# EAGLE board Qwiic_Alphanumeric_Display-Panel (EAGLE 9.4.2), part 1 of 4
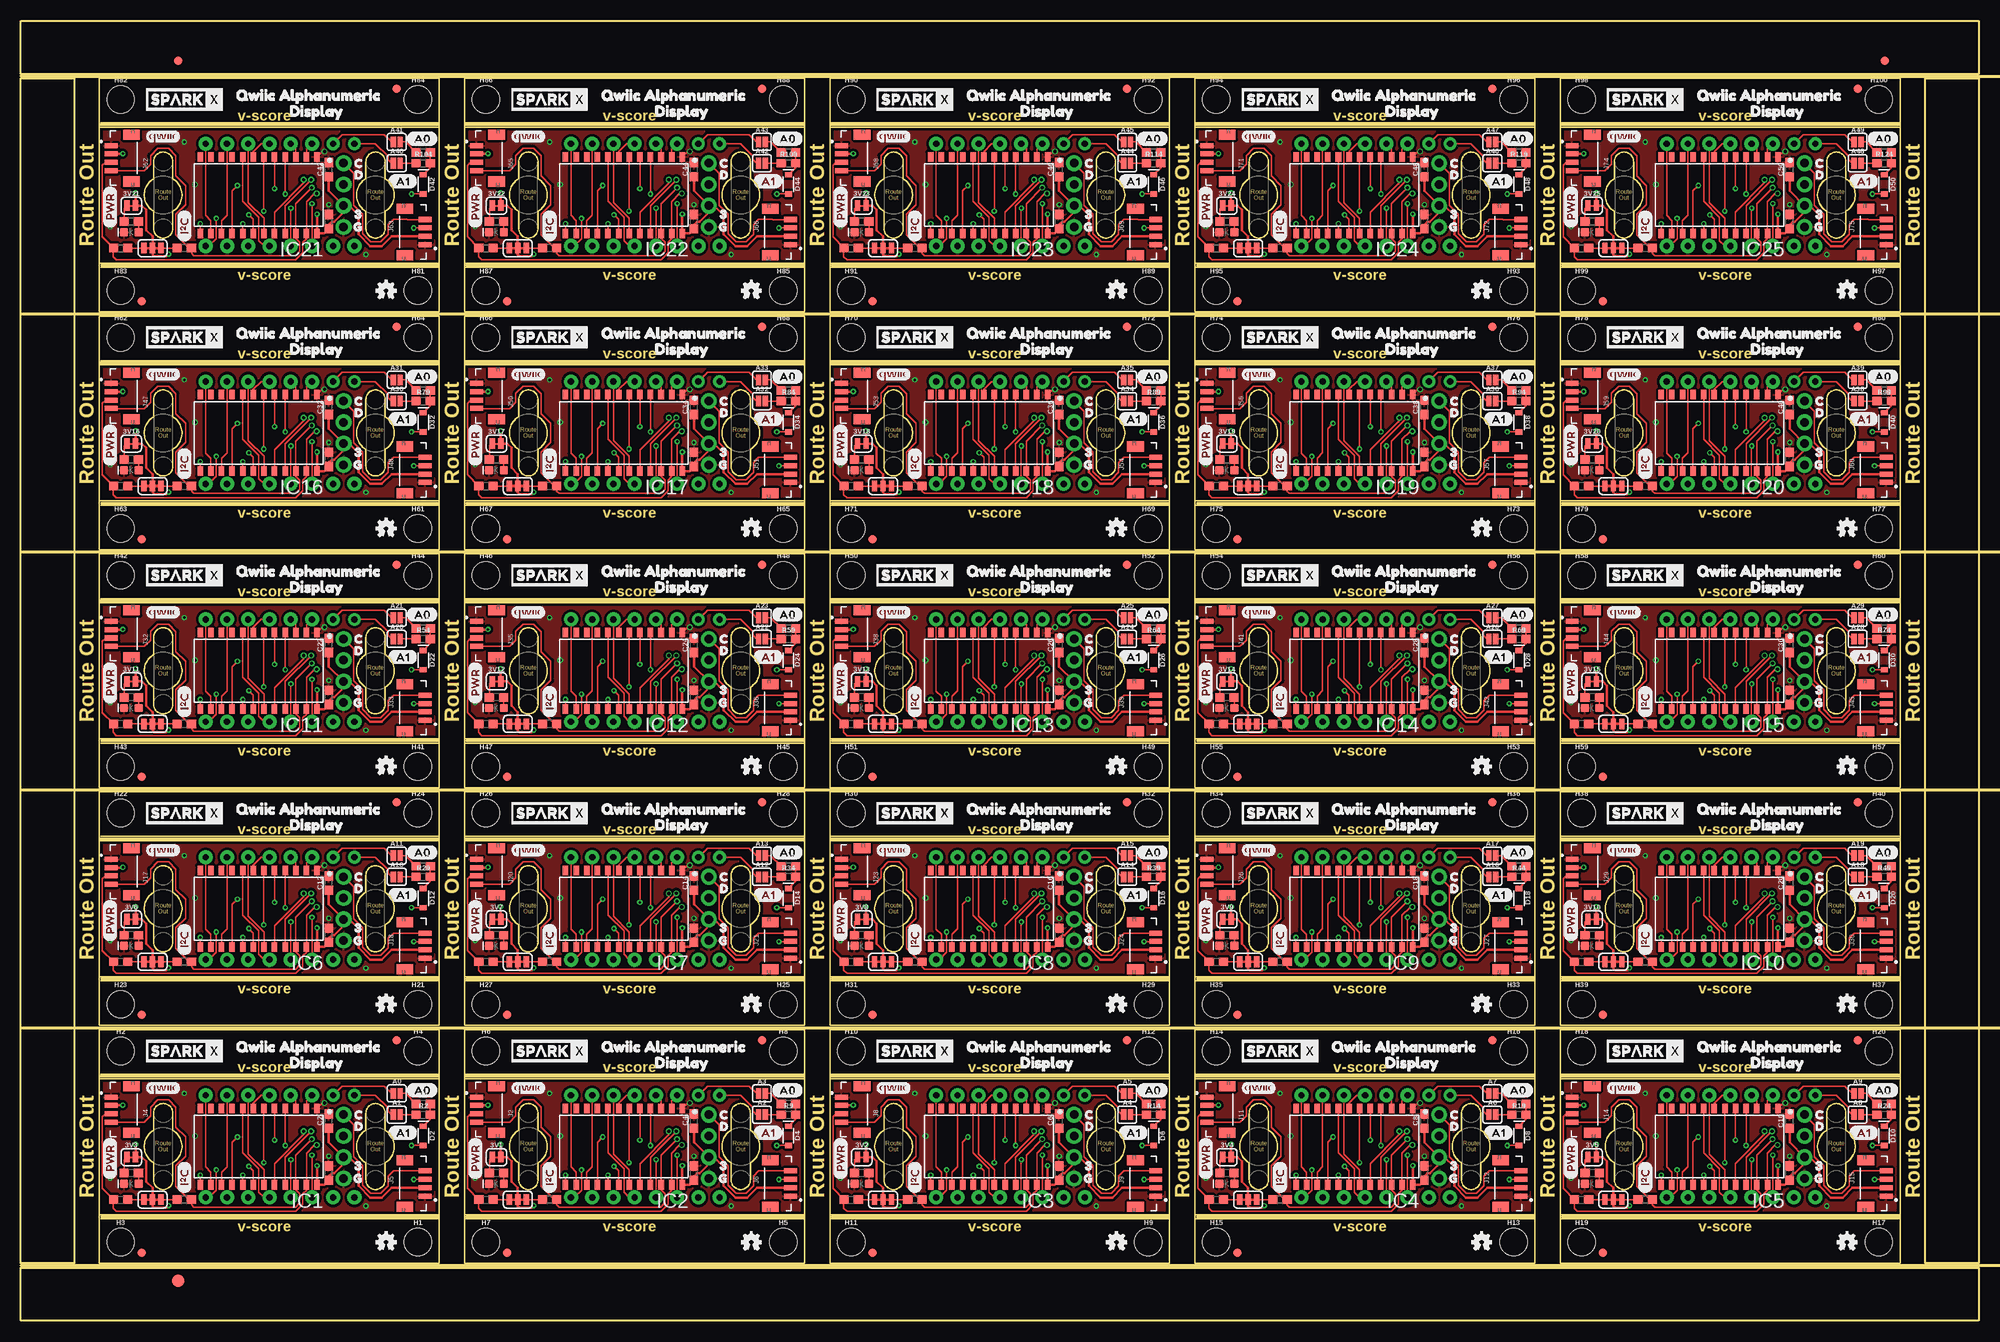
[diagram p0: board, top side]
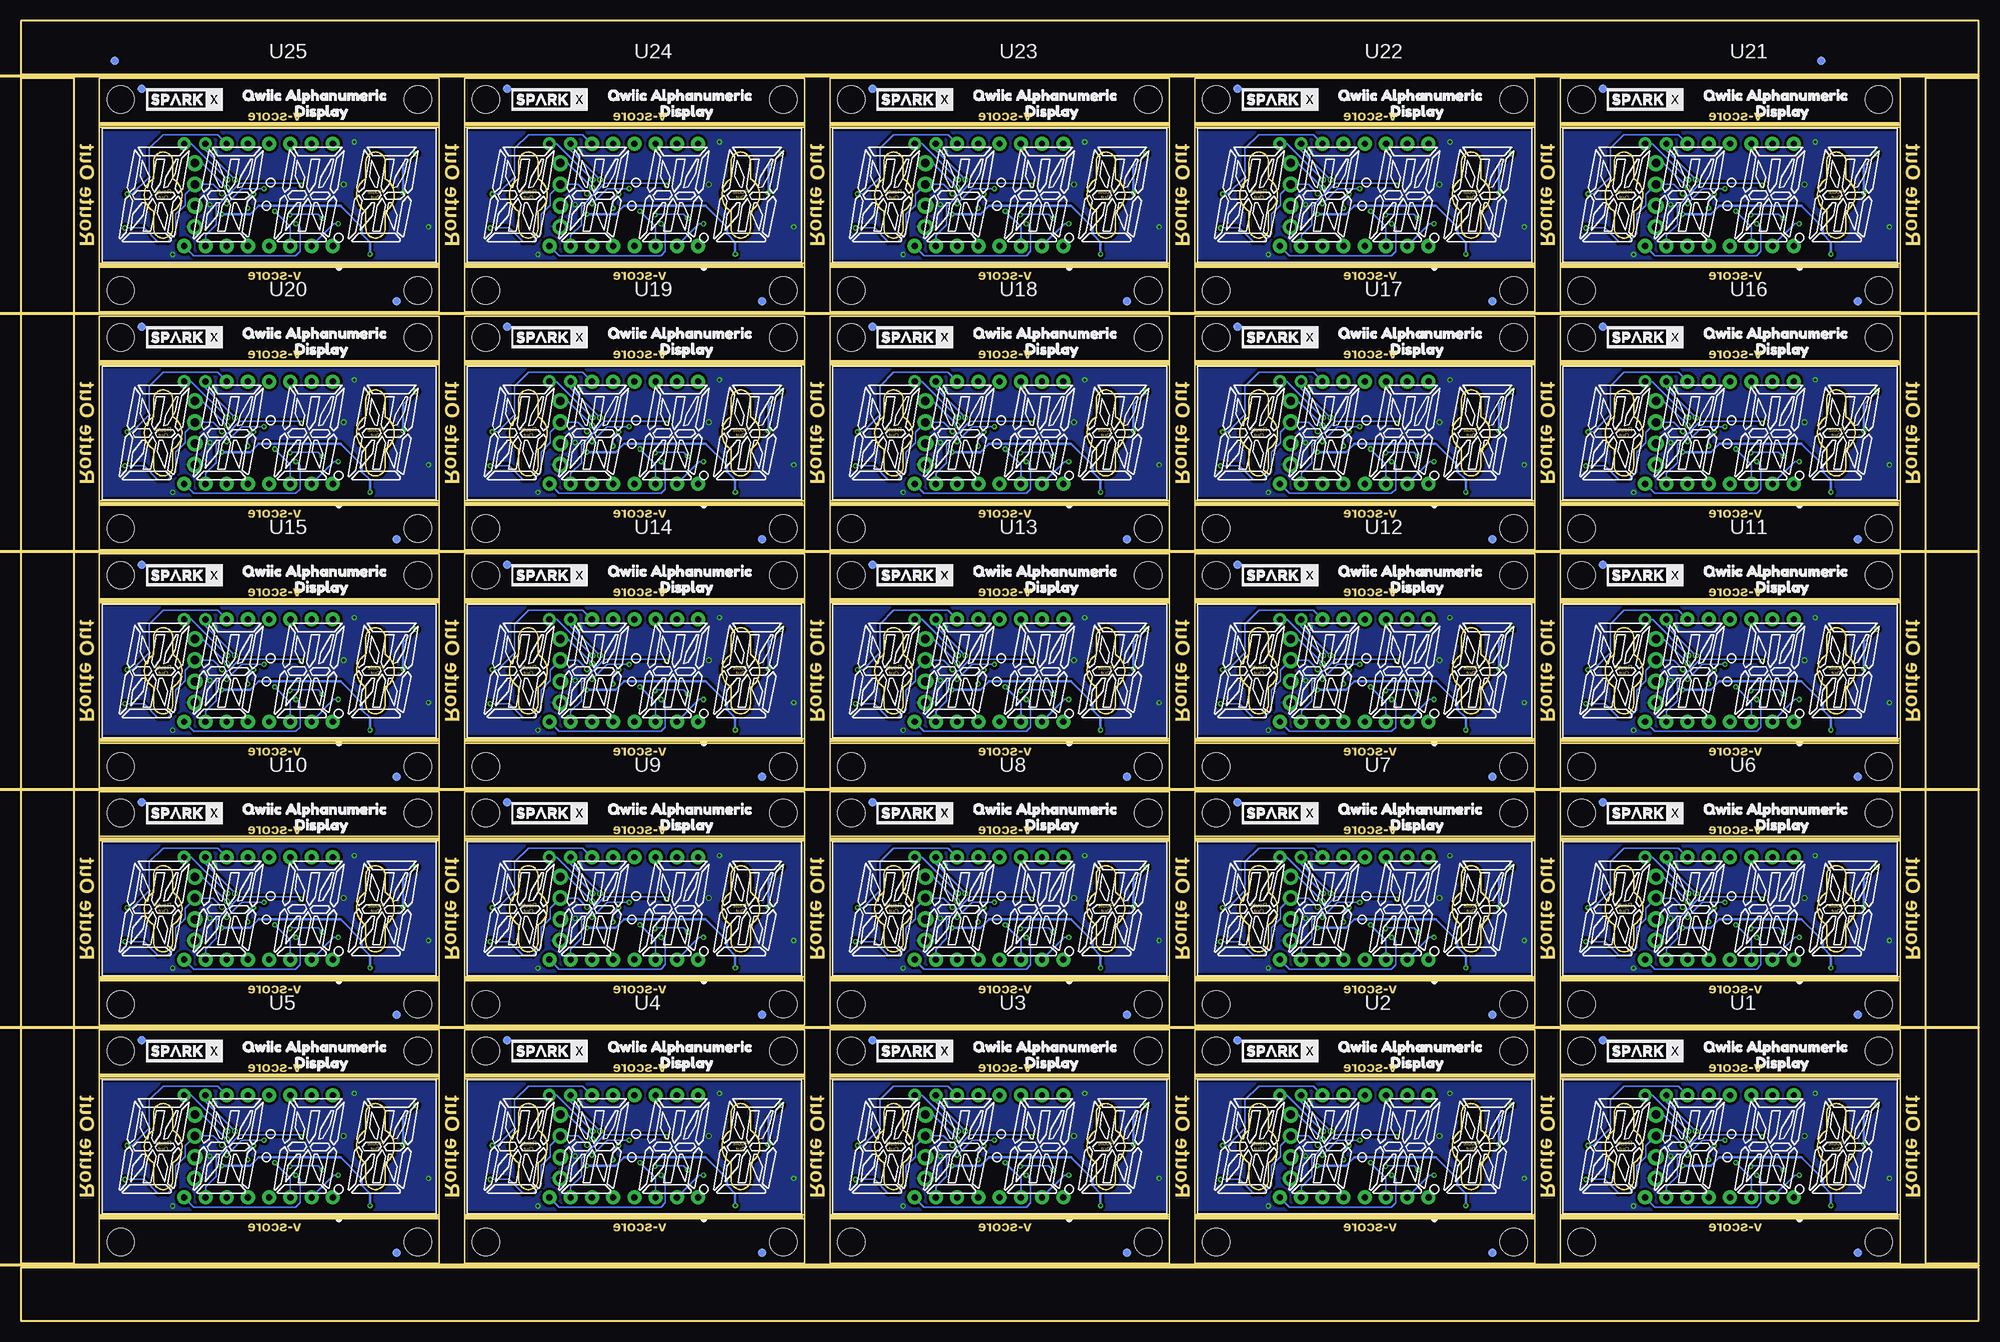
[diagram p1: board, bottom side, seen from below]

Size 234.19 x 155.45 mm. Coordinates in mm from the lower left corner, seen from the top.
Outline: 316 segments
Copper layers (1*16): Top 0.035mm / dielectric 1.5mm / Bottom 0.035mm
Design rules "Qwiic_Alphanumeric_Display": minimum track width 6mil, minimum drill 0.3mm, track to track 6mil, track to pad 6mil, pad to pad 6mil, via to via 6mil, smd to smd 6mil, copper to edge 6mil, drill to drill 6mil, minimum pad ring 6mil, minimum via ring 6mil, stop-mask expansion 4mil, vias tented up to drill 25mil, thermal gap 10mil
Milling: 56 lines

## Footprints (pad centres in the part's own frame; a part is rotated, then mirrored left to right if it is on the bottom)
SMT-JUMPER_2_NC_TRACE_SILK = smd 0.635 x 1.27: 1 -0.508,0; 2 0.508,0
SMT-JUMPER_2_NO_SILK = smd 0.635 x 1.27: 1 -0.406,0; 2 0.406,0
0603 = smd 1.1 x 1: 1 -0.85,0; 2 0.85,0
LED-0603 = smd 1 x 1: A -0.877,0; C 0.877,0
SOD-323 = smd 0.63 x 0.83: A 1.15,0; C -1.15,0
FIDUCIAL-1X2 = smd 1 x 1: 1 0,0
FIDUCIAL-1.5X3 = smd 1.5 x 1.5: 1 0,0
STAND-OFF = hole 3.302: 0,0
SMT-JUMPER_3_2-NC_TRACE_SILK = smd 0.635 x 1.27: 1 -1.016,0; 2 0,0; 3 1.016,0
HT16K33 = smd 0.66 x 1.143: 1 -6.985,-4.572; 2 -5.715,-4.572; 3 -4.445,-4.572; 4 -3.175,-4.572; 5 -1.905,-4.572; 6 -0.635,-4.572; 7 0.635,-4.572; 8 1.905,-4.572; 9 3.175,-4.572; 10 4.445,-4.572; 11 5.715,-4.572; 12 6.985,-4.572; 13 6.985,4.572; 14 5.715,4.572; 15 4.445,4.572; 16 3.175,4.572; 17 1.905,4.572; 18 0.635,4.572; 19 -0.635,4.572; 20 -1.905,4.572; 21 -3.175,4.572; 22 -4.445,4.572; 23 -5.715,4.572; 24 -6.985,4.572
1X04_NO_SILK = drill 1.016 pad 1.88: 1 0,0; 2 2.54,0; 3 5.08,0; 4 7.62,0
JST04_1MM_VERT = smd 0.6 x 1.55: 1 -1.478,0.775; 2 -0.478,0.775; 3 0.522,0.775; 4 1.522,0.775 | smd 1.2 x 2: NC1 -2.778,3.2; NC2 2.822,3.2
SILSMART_DISPLAY = drill 0.75 pad 1.676: 1 -10.178,-6.092; 2 -7.638,-6.092; 3 -5.098,-6.092; 4 -2.558,-6.092; 5 -0.018,-6.092; 6 2.522,-6.092; 7 5.062,-6.092; 8 7.602,-6.092; 9 7.602,6.148; 10 5.062,6.148; 11 2.522,6.148; 12 -0.018,6.148; 13 -2.558,6.148; 14 -5.098,6.148 | drill 0.75 pad 1.524: 15 -7.638,6.148; 16 -10.178,6.148

## Placement (x,y rotation side)
3V1  JUMPER-SMT_2_NC_TRACE_SILK  [SMT-JUMPER_2_NC_TRACE_SILK]  56.9,19.56 0 top
3V2  JUMPER-SMT_2_NC_TRACE_SILK  [SMT-JUMPER_2_NC_TRACE_SILK]  100.58,19.56 0 top
3V3  JUMPER-SMT_2_NC_TRACE_SILK  [SMT-JUMPER_2_NC_TRACE_SILK]  13.21,19.56 0 top
3V4  JUMPER-SMT_2_NC_TRACE_SILK  [SMT-JUMPER_2_NC_TRACE_SILK]  144.27,19.56 0 top
3V5  JUMPER-SMT_2_NC_TRACE_SILK  [SMT-JUMPER_2_NC_TRACE_SILK]  187.96,19.56 0 top
3V6  JUMPER-SMT_2_NC_TRACE_SILK  [SMT-JUMPER_2_NC_TRACE_SILK]  13.21,48.01 0 top
3V7  JUMPER-SMT_2_NC_TRACE_SILK  [SMT-JUMPER_2_NC_TRACE_SILK]  56.9,48.01 0 top
3V8  JUMPER-SMT_2_NC_TRACE_SILK  [SMT-JUMPER_2_NC_TRACE_SILK]  100.58,48.01 0 top
3V9  JUMPER-SMT_2_NC_TRACE_SILK  [SMT-JUMPER_2_NC_TRACE_SILK]  144.27,48.01 0 top
3V10  JUMPER-SMT_2_NC_TRACE_SILK  [SMT-JUMPER_2_NC_TRACE_SILK]  187.96,48.01 0 top
3V11  JUMPER-SMT_2_NC_TRACE_SILK  [SMT-JUMPER_2_NC_TRACE_SILK]  13.21,76.45 0 top
3V12  JUMPER-SMT_2_NC_TRACE_SILK  [SMT-JUMPER_2_NC_TRACE_SILK]  56.9,76.45 0 top
3V13  JUMPER-SMT_2_NC_TRACE_SILK  [SMT-JUMPER_2_NC_TRACE_SILK]  100.58,76.45 0 top
3V14  JUMPER-SMT_2_NC_TRACE_SILK  [SMT-JUMPER_2_NC_TRACE_SILK]  144.27,76.45 0 top
3V15  JUMPER-SMT_2_NC_TRACE_SILK  [SMT-JUMPER_2_NC_TRACE_SILK]  187.96,76.45 0 top
3V16  JUMPER-SMT_2_NC_TRACE_SILK  [SMT-JUMPER_2_NC_TRACE_SILK]  13.21,104.9 0 top
3V17  JUMPER-SMT_2_NC_TRACE_SILK  [SMT-JUMPER_2_NC_TRACE_SILK]  56.9,104.9 0 top
3V18  JUMPER-SMT_2_NC_TRACE_SILK  [SMT-JUMPER_2_NC_TRACE_SILK]  100.58,104.9 0 top
3V19  JUMPER-SMT_2_NC_TRACE_SILK  [SMT-JUMPER_2_NC_TRACE_SILK]  144.27,104.9 0 top
3V20  JUMPER-SMT_2_NC_TRACE_SILK  [SMT-JUMPER_2_NC_TRACE_SILK]  187.96,104.9 0 top
3V21  JUMPER-SMT_2_NC_TRACE_SILK  [SMT-JUMPER_2_NC_TRACE_SILK]  13.21,133.35 0 top
3V22  JUMPER-SMT_2_NC_TRACE_SILK  [SMT-JUMPER_2_NC_TRACE_SILK]  56.9,133.35 0 top
3V23  JUMPER-SMT_2_NC_TRACE_SILK  [SMT-JUMPER_2_NC_TRACE_SILK]  100.58,133.35 0 top
3V24  JUMPER-SMT_2_NC_TRACE_SILK  [SMT-JUMPER_2_NC_TRACE_SILK]  144.27,133.35 0 top
3V25  JUMPER-SMT_2_NC_TRACE_SILK  [SMT-JUMPER_2_NC_TRACE_SILK]  187.96,133.35 0 top
A0  JUMPER-SMT_2_NO_SILK  [SMT-JUMPER_2_NO_SILK]  44.96,27.18 0 top
A1  JUMPER-SMT_2_NO_SILK  [SMT-JUMPER_2_NO_SILK]  44.96,24.64 0 top
A2  JUMPER-SMT_2_NO_SILK  [SMT-JUMPER_2_NO_SILK]  88.65,24.64 0 top
A3  JUMPER-SMT_2_NO_SILK  [SMT-JUMPER_2_NO_SILK]  88.65,27.18 0 top
A4  JUMPER-SMT_2_NO_SILK  [SMT-JUMPER_2_NO_SILK]  132.33,24.64 0 top
A5  JUMPER-SMT_2_NO_SILK  [SMT-JUMPER_2_NO_SILK]  132.33,27.18 0 top
A6  JUMPER-SMT_2_NO_SILK  [SMT-JUMPER_2_NO_SILK]  176.02,24.64 0 top
A7  JUMPER-SMT_2_NO_SILK  [SMT-JUMPER_2_NO_SILK]  176.02,27.18 0 top
A8  JUMPER-SMT_2_NO_SILK  [SMT-JUMPER_2_NO_SILK]  219.71,24.64 0 top
A9  JUMPER-SMT_2_NO_SILK  [SMT-JUMPER_2_NO_SILK]  219.71,27.18 0 top
A10  JUMPER-SMT_2_NO_SILK  [SMT-JUMPER_2_NO_SILK]  44.96,53.09 0 top
A11  JUMPER-SMT_2_NO_SILK  [SMT-JUMPER_2_NO_SILK]  44.96,55.63 0 top
A12  JUMPER-SMT_2_NO_SILK  [SMT-JUMPER_2_NO_SILK]  88.65,53.09 0 top
A13  JUMPER-SMT_2_NO_SILK  [SMT-JUMPER_2_NO_SILK]  88.65,55.63 0 top
A14  JUMPER-SMT_2_NO_SILK  [SMT-JUMPER_2_NO_SILK]  132.33,53.09 0 top
A15  JUMPER-SMT_2_NO_SILK  [SMT-JUMPER_2_NO_SILK]  132.33,55.63 0 top
A16  JUMPER-SMT_2_NO_SILK  [SMT-JUMPER_2_NO_SILK]  176.02,53.09 0 top
A17  JUMPER-SMT_2_NO_SILK  [SMT-JUMPER_2_NO_SILK]  176.02,55.63 0 top
A18  JUMPER-SMT_2_NO_SILK  [SMT-JUMPER_2_NO_SILK]  219.71,53.09 0 top
A19  JUMPER-SMT_2_NO_SILK  [SMT-JUMPER_2_NO_SILK]  219.71,55.63 0 top
A20  JUMPER-SMT_2_NO_SILK  [SMT-JUMPER_2_NO_SILK]  44.96,81.53 0 top
A21  JUMPER-SMT_2_NO_SILK  [SMT-JUMPER_2_NO_SILK]  44.96,84.07 0 top
A22  JUMPER-SMT_2_NO_SILK  [SMT-JUMPER_2_NO_SILK]  88.65,81.53 0 top
A23  JUMPER-SMT_2_NO_SILK  [SMT-JUMPER_2_NO_SILK]  88.65,84.07 0 top
A24  JUMPER-SMT_2_NO_SILK  [SMT-JUMPER_2_NO_SILK]  132.33,81.53 0 top
A25  JUMPER-SMT_2_NO_SILK  [SMT-JUMPER_2_NO_SILK]  132.33,84.07 0 top
A26  JUMPER-SMT_2_NO_SILK  [SMT-JUMPER_2_NO_SILK]  176.02,81.53 0 top
A27  JUMPER-SMT_2_NO_SILK  [SMT-JUMPER_2_NO_SILK]  176.02,84.07 0 top
A28  JUMPER-SMT_2_NO_SILK  [SMT-JUMPER_2_NO_SILK]  219.71,81.53 0 top
A29  JUMPER-SMT_2_NO_SILK  [SMT-JUMPER_2_NO_SILK]  219.71,84.07 0 top
A30  JUMPER-SMT_2_NO_SILK  [SMT-JUMPER_2_NO_SILK]  44.96,109.98 0 top
A31  JUMPER-SMT_2_NO_SILK  [SMT-JUMPER_2_NO_SILK]  44.96,112.52 0 top
A32  JUMPER-SMT_2_NO_SILK  [SMT-JUMPER_2_NO_SILK]  88.65,109.98 0 top
A33  JUMPER-SMT_2_NO_SILK  [SMT-JUMPER_2_NO_SILK]  88.65,112.52 0 top
A34  JUMPER-SMT_2_NO_SILK  [SMT-JUMPER_2_NO_SILK]  132.33,109.98 0 top
A35  JUMPER-SMT_2_NO_SILK  [SMT-JUMPER_2_NO_SILK]  132.33,112.52 0 top
A36  JUMPER-SMT_2_NO_SILK  [SMT-JUMPER_2_NO_SILK]  176.02,109.98 0 top
A37  JUMPER-SMT_2_NO_SILK  [SMT-JUMPER_2_NO_SILK]  176.02,112.52 0 top
A38  JUMPER-SMT_2_NO_SILK  [SMT-JUMPER_2_NO_SILK]  219.71,109.98 0 top
A39  JUMPER-SMT_2_NO_SILK  [SMT-JUMPER_2_NO_SILK]  219.71,112.52 0 top
A40  JUMPER-SMT_2_NO_SILK  [SMT-JUMPER_2_NO_SILK]  44.96,138.43 0 top
A41  JUMPER-SMT_2_NO_SILK  [SMT-JUMPER_2_NO_SILK]  44.96,140.97 0 top
A42  JUMPER-SMT_2_NO_SILK  [SMT-JUMPER_2_NO_SILK]  88.65,138.43 0 top
A43  JUMPER-SMT_2_NO_SILK  [SMT-JUMPER_2_NO_SILK]  88.65,140.97 0 top
A44  JUMPER-SMT_2_NO_SILK  [SMT-JUMPER_2_NO_SILK]  132.33,138.43 0 top
A45  JUMPER-SMT_2_NO_SILK  [SMT-JUMPER_2_NO_SILK]  132.33,140.97 0 top
A46  JUMPER-SMT_2_NO_SILK  [SMT-JUMPER_2_NO_SILK]  176.02,138.43 0 top
A47  JUMPER-SMT_2_NO_SILK  [SMT-JUMPER_2_NO_SILK]  176.02,140.97 0 top
A48  JUMPER-SMT_2_NO_SILK  [SMT-JUMPER_2_NO_SILK]  219.71,138.43 0 top
A49  JUMPER-SMT_2_NO_SILK  [SMT-JUMPER_2_NO_SILK]  219.71,140.97 0 top
C1  0.1uF  [0603]  36.83,17.65 90 top
C2  10uF  [0603]  36.83,23.88 90 top
C3  0.1uF  [0603]  80.52,17.65 90 top
C4  10uF  [0603]  80.52,23.88 90 top
C5  0.1uF  [0603]  124.21,17.65 90 top
C6  10uF  [0603]  124.21,23.88 90 top
C7  0.1uF  [0603]  167.89,17.65 90 top
C8  10uF  [0603]  167.89,23.88 90 top
C9  0.1uF  [0603]  211.58,17.65 90 top
C10  10uF  [0603]  211.58,23.88 90 top
C11  0.1uF  [0603]  36.83,46.1 90 top
C12  10uF  [0603]  36.83,52.32 90 top
C13  0.1uF  [0603]  80.52,46.1 90 top
C14  10uF  [0603]  80.52,52.32 90 top
C15  0.1uF  [0603]  124.21,46.1 90 top
C16  10uF  [0603]  124.21,52.32 90 top
C17  0.1uF  [0603]  167.89,46.1 90 top
C18  10uF  [0603]  167.89,52.32 90 top
C19  0.1uF  [0603]  211.58,46.1 90 top
C20  10uF  [0603]  211.58,52.32 90 top
C21  0.1uF  [0603]  36.83,74.55 90 top
C22  10uF  [0603]  36.83,80.77 90 top
C23  0.1uF  [0603]  80.52,74.55 90 top
C24  10uF  [0603]  80.52,80.77 90 top
C25  0.1uF  [0603]  124.21,74.55 90 top
C26  10uF  [0603]  124.21,80.77 90 top
C27  0.1uF  [0603]  167.89,74.55 90 top
C28  10uF  [0603]  167.89,80.77 90 top
C29  0.1uF  [0603]  211.58,74.55 90 top
C30  10uF  [0603]  211.58,80.77 90 top
C31  0.1uF  [0603]  36.83,103 90 top
C32  10uF  [0603]  36.83,109.22 90 top
C33  0.1uF  [0603]  80.52,103 90 top
C34  10uF  [0603]  80.52,109.22 90 top
C35  0.1uF  [0603]  124.21,103 90 top
C36  10uF  [0603]  124.21,109.22 90 top
C37  0.1uF  [0603]  167.89,103 90 top
C38  10uF  [0603]  167.89,109.22 90 top
C39  0.1uF  [0603]  211.58,103 90 top
C40  10uF  [0603]  211.58,109.22 90 top
C41  0.1uF  [0603]  36.83,131.44 90 top
C42  10uF  [0603]  36.83,137.67 90 top
C43  0.1uF  [0603]  80.52,131.44 90 top
C44  10uF  [0603]  80.52,137.67 90 top
C45  0.1uF  [0603]  124.21,131.44 90 top
C46  10uF  [0603]  124.21,137.67 90 top
C47  0.1uF  [0603]  167.89,131.44 90 top
C48  10uF  [0603]  167.89,137.67 90 top
C49  0.1uF  [0603]  211.58,131.44 90 top
C50  10uF  [0603]  211.58,137.67 90 top
D1  RED  [LED-0603]  13.21,16.38 180 top
D2  250mA/100V  [SOD-323]  48.13,22.1 270 top
D3  RED  [LED-0603]  56.9,16.38 180 top
D4  250mA/100V  [SOD-323]  91.82,22.1 270 top
D5  RED  [LED-0603]  100.58,16.38 180 top
D6  250mA/100V  [SOD-323]  135.51,22.1 270 top
D7  RED  [LED-0603]  144.27,16.38 180 top
D8  250mA/100V  [SOD-323]  179.2,22.1 270 top
D9  RED  [LED-0603]  187.96,16.38 180 top
D10  250mA/100V  [SOD-323]  222.88,22.1 270 top
D11  RED  [LED-0603]  13.21,44.83 180 top
D12  250mA/100V  [SOD-323]  48.13,50.55 270 top
D13  RED  [LED-0603]  56.9,44.83 180 top
D14  250mA/100V  [SOD-323]  91.82,50.55 270 top
D15  RED  [LED-0603]  100.58,44.83 180 top
D16  250mA/100V  [SOD-323]  135.51,50.55 270 top
D17  RED  [LED-0603]  144.27,44.83 180 top
D18  250mA/100V  [SOD-323]  179.2,50.55 270 top
D19  RED  [LED-0603]  187.96,44.83 180 top
D20  250mA/100V  [SOD-323]  222.88,50.55 270 top
D21  RED  [LED-0603]  13.21,73.28 180 top
D22  250mA/100V  [SOD-323]  48.13,78.99 270 top
D23  RED  [LED-0603]  56.9,73.28 180 top
D24  250mA/100V  [SOD-323]  91.82,78.99 270 top
D25  RED  [LED-0603]  100.58,73.28 180 top
D26  250mA/100V  [SOD-323]  135.51,78.99 270 top
D27  RED  [LED-0603]  144.27,73.28 180 top
D28  250mA/100V  [SOD-323]  179.2,78.99 270 top
D29  RED  [LED-0603]  187.96,73.28 180 top
D30  250mA/100V  [SOD-323]  222.88,78.99 270 top
D31  RED  [LED-0603]  13.21,101.73 180 top
D32  250mA/100V  [SOD-323]  48.13,107.44 270 top
D33  RED  [LED-0603]  56.9,101.73 180 top
D34  250mA/100V  [SOD-323]  91.82,107.44 270 top
D35  RED  [LED-0603]  100.58,101.73 180 top
D36  250mA/100V  [SOD-323]  135.51,107.44 270 top
D37  RED  [LED-0603]  144.27,101.73 180 top
D38  250mA/100V  [SOD-323]  179.2,107.44 270 top
D39  RED  [LED-0603]  187.96,101.73 180 top
D40  250mA/100V  [SOD-323]  222.88,107.44 270 top
D41  RED  [LED-0603]  13.21,130.17 180 top
D42  250mA/100V  [SOD-323]  48.13,135.89 270 top
D43  RED  [LED-0603]  56.9,130.17 180 top
D44  250mA/100V  [SOD-323]  91.82,135.89 270 top
D45  RED  [LED-0603]  100.58,130.17 180 top
D46  250mA/100V  [SOD-323]  135.51,135.89 270 top
D47  RED  [LED-0603]  144.27,130.17 180 top
D48  250mA/100V  [SOD-323]  179.2,135.89 270 top
D49  RED  [LED-0603]  187.96,130.17 180 top
D50  250mA/100V  [SOD-323]  222.88,135.89 270 top
E$1  [FIDUCIAL-1X2]  18.8,150.69 0 top
E$2  [FIDUCIAL-1X2]  18.8,150.69 0 bottom
E$3  [FIDUCIAL-1X2]  222.95,150.69 0 top
E$4  [FIDUCIAL-1X2]  222.95,150.69 0 bottom
E$5  [FIDUCIAL-1.5X3]  18.8,4.76 0 top
FD1  FIDUCIAL1X2  [FIDUCIAL-1X2]  14.48,8.13 0 top
FD2  FIDUCIAL1X2  [FIDUCIAL-1X2]  14.48,8.13 0 bottom
FD3  FIDUCIAL1X2  [FIDUCIAL-1X2]  44.96,33.53 0 top
FD4  FIDUCIAL1X2  [FIDUCIAL-1X2]  44.96,33.53 0 bottom
FD5  FIDUCIAL1X2  [FIDUCIAL-1X2]  58.17,8.13 0 top
FD6  FIDUCIAL1X2  [FIDUCIAL-1X2]  58.17,8.13 0 bottom
FD7  FIDUCIAL1X2  [FIDUCIAL-1X2]  88.65,33.53 0 top
FD8  FIDUCIAL1X2  [FIDUCIAL-1X2]  88.65,33.53 0 bottom
FD9  FIDUCIAL1X2  [FIDUCIAL-1X2]  101.85,8.13 0 top
FD10  FIDUCIAL1X2  [FIDUCIAL-1X2]  101.85,8.13 0 bottom
FD11  FIDUCIAL1X2  [FIDUCIAL-1X2]  132.33,33.53 0 top
FD12  FIDUCIAL1X2  [FIDUCIAL-1X2]  132.33,33.53 0 bottom
FD13  FIDUCIAL1X2  [FIDUCIAL-1X2]  145.54,8.13 0 top
FD14  FIDUCIAL1X2  [FIDUCIAL-1X2]  145.54,8.13 0 bottom
FD15  FIDUCIAL1X2  [FIDUCIAL-1X2]  176.02,33.53 0 top
FD16  FIDUCIAL1X2  [FIDUCIAL-1X2]  176.02,33.53 0 bottom
FD17  FIDUCIAL1X2  [FIDUCIAL-1X2]  189.23,8.13 0 top
FD18  FIDUCIAL1X2  [FIDUCIAL-1X2]  189.23,8.13 0 bottom
FD19  FIDUCIAL1X2  [FIDUCIAL-1X2]  219.71,33.53 0 top
FD20  FIDUCIAL1X2  [FIDUCIAL-1X2]  219.71,33.53 0 bottom
FD21  FIDUCIAL1X2  [FIDUCIAL-1X2]  14.48,36.58 0 top
FD22  FIDUCIAL1X2  [FIDUCIAL-1X2]  14.48,36.58 0 bottom
FD23  FIDUCIAL1X2  [FIDUCIAL-1X2]  44.96,61.98 0 top
FD24  FIDUCIAL1X2  [FIDUCIAL-1X2]  44.96,61.98 0 bottom
FD25  FIDUCIAL1X2  [FIDUCIAL-1X2]  58.17,36.58 0 top
FD26  FIDUCIAL1X2  [FIDUCIAL-1X2]  58.17,36.58 0 bottom
FD27  FIDUCIAL1X2  [FIDUCIAL-1X2]  88.65,61.98 0 top
FD28  FIDUCIAL1X2  [FIDUCIAL-1X2]  88.65,61.98 0 bottom
FD29  FIDUCIAL1X2  [FIDUCIAL-1X2]  101.85,36.58 0 top
FD30  FIDUCIAL1X2  [FIDUCIAL-1X2]  101.85,36.58 0 bottom
FD31  FIDUCIAL1X2  [FIDUCIAL-1X2]  132.33,61.98 0 top
FD32  FIDUCIAL1X2  [FIDUCIAL-1X2]  132.33,61.98 0 bottom
FD33  FIDUCIAL1X2  [FIDUCIAL-1X2]  145.54,36.58 0 top
FD34  FIDUCIAL1X2  [FIDUCIAL-1X2]  145.54,36.58 0 bottom
FD35  FIDUCIAL1X2  [FIDUCIAL-1X2]  176.02,61.98 0 top
FD36  FIDUCIAL1X2  [FIDUCIAL-1X2]  176.02,61.98 0 bottom
FD37  FIDUCIAL1X2  [FIDUCIAL-1X2]  189.23,36.58 0 top
FD38  FIDUCIAL1X2  [FIDUCIAL-1X2]  189.23,36.58 0 bottom
FD39  FIDUCIAL1X2  [FIDUCIAL-1X2]  219.71,61.98 0 top
FD40  FIDUCIAL1X2  [FIDUCIAL-1X2]  219.71,61.98 0 bottom
FD41  FIDUCIAL1X2  [FIDUCIAL-1X2]  14.48,65.02 0 top
FD42  FIDUCIAL1X2  [FIDUCIAL-1X2]  14.48,65.02 0 bottom
FD43  FIDUCIAL1X2  [FIDUCIAL-1X2]  44.96,90.42 0 top
FD44  FIDUCIAL1X2  [FIDUCIAL-1X2]  44.96,90.42 0 bottom
FD45  FIDUCIAL1X2  [FIDUCIAL-1X2]  58.17,65.02 0 top
FD46  FIDUCIAL1X2  [FIDUCIAL-1X2]  58.17,65.02 0 bottom
FD47  FIDUCIAL1X2  [FIDUCIAL-1X2]  88.65,90.42 0 top
FD48  FIDUCIAL1X2  [FIDUCIAL-1X2]  88.65,90.42 0 bottom
FD49  FIDUCIAL1X2  [FIDUCIAL-1X2]  101.85,65.02 0 top
FD50  FIDUCIAL1X2  [FIDUCIAL-1X2]  101.85,65.02 0 bottom
FD51  FIDUCIAL1X2  [FIDUCIAL-1X2]  132.33,90.42 0 top
FD52  FIDUCIAL1X2  [FIDUCIAL-1X2]  132.33,90.42 0 bottom
FD53  FIDUCIAL1X2  [FIDUCIAL-1X2]  145.54,65.02 0 top
FD54  FIDUCIAL1X2  [FIDUCIAL-1X2]  145.54,65.02 0 bottom
FD55  FIDUCIAL1X2  [FIDUCIAL-1X2]  176.02,90.42 0 top
FD56  FIDUCIAL1X2  [FIDUCIAL-1X2]  176.02,90.42 0 bottom
FD57  FIDUCIAL1X2  [FIDUCIAL-1X2]  189.23,65.02 0 top
FD58  FIDUCIAL1X2  [FIDUCIAL-1X2]  189.23,65.02 0 bottom
FD59  FIDUCIAL1X2  [FIDUCIAL-1X2]  219.71,90.42 0 top
FD60  FIDUCIAL1X2  [FIDUCIAL-1X2]  219.71,90.42 0 bottom
FD61  FIDUCIAL1X2  [FIDUCIAL-1X2]  14.48,93.47 0 top
FD62  FIDUCIAL1X2  [FIDUCIAL-1X2]  14.48,93.47 0 bottom
FD63  FIDUCIAL1X2  [FIDUCIAL-1X2]  44.96,118.87 0 top
FD64  FIDUCIAL1X2  [FIDUCIAL-1X2]  44.96,118.87 0 bottom
FD65  FIDUCIAL1X2  [FIDUCIAL-1X2]  58.17,93.47 0 top
FD66  FIDUCIAL1X2  [FIDUCIAL-1X2]  58.17,93.47 0 bottom
FD67  FIDUCIAL1X2  [FIDUCIAL-1X2]  88.65,118.87 0 top
FD68  FIDUCIAL1X2  [FIDUCIAL-1X2]  88.65,118.87 0 bottom
FD69  FIDUCIAL1X2  [FIDUCIAL-1X2]  101.85,93.47 0 top
FD70  FIDUCIAL1X2  [FIDUCIAL-1X2]  101.85,93.47 0 bottom
FD71  FIDUCIAL1X2  [FIDUCIAL-1X2]  132.33,118.87 0 top
FD72  FIDUCIAL1X2  [FIDUCIAL-1X2]  132.33,118.87 0 bottom
FD73  FIDUCIAL1X2  [FIDUCIAL-1X2]  145.54,93.47 0 top
FD74  FIDUCIAL1X2  [FIDUCIAL-1X2]  145.54,93.47 0 bottom
FD75  FIDUCIAL1X2  [FIDUCIAL-1X2]  176.02,118.87 0 top
FD76  FIDUCIAL1X2  [FIDUCIAL-1X2]  176.02,118.87 0 bottom
FD77  FIDUCIAL1X2  [FIDUCIAL-1X2]  189.23,93.47 0 top
FD78  FIDUCIAL1X2  [FIDUCIAL-1X2]  189.23,93.47 0 bottom
FD79  FIDUCIAL1X2  [FIDUCIAL-1X2]  219.71,118.87 0 top
FD80  FIDUCIAL1X2  [FIDUCIAL-1X2]  219.71,118.87 0 bottom
FD81  FIDUCIAL1X2  [FIDUCIAL-1X2]  14.48,121.92 0 top
FD82  FIDUCIAL1X2  [FIDUCIAL-1X2]  14.48,121.92 0 bottom
FD83  FIDUCIAL1X2  [FIDUCIAL-1X2]  44.96,147.32 0 top
FD84  FIDUCIAL1X2  [FIDUCIAL-1X2]  44.96,147.32 0 bottom
FD85  FIDUCIAL1X2  [FIDUCIAL-1X2]  58.17,121.92 0 top
FD86  FIDUCIAL1X2  [FIDUCIAL-1X2]  58.17,121.92 0 bottom
FD87  FIDUCIAL1X2  [FIDUCIAL-1X2]  88.65,147.32 0 top
FD88  FIDUCIAL1X2  [FIDUCIAL-1X2]  88.65,147.32 0 bottom
FD89  FIDUCIAL1X2  [FIDUCIAL-1X2]  101.85,121.92 0 top
FD90  FIDUCIAL1X2  [FIDUCIAL-1X2]  101.85,121.92 0 bottom
FD91  FIDUCIAL1X2  [FIDUCIAL-1X2]  132.33,147.32 0 top
FD92  FIDUCIAL1X2  [FIDUCIAL-1X2]  132.33,147.32 0 bottom
FD93  FIDUCIAL1X2  [FIDUCIAL-1X2]  145.54,121.92 0 top
FD94  FIDUCIAL1X2  [FIDUCIAL-1X2]  145.54,121.92 0 bottom
FD95  FIDUCIAL1X2  [FIDUCIAL-1X2]  176.02,147.32 0 top
FD96  FIDUCIAL1X2  [FIDUCIAL-1X2]  176.02,147.32 0 bottom
FD97  FIDUCIAL1X2  [FIDUCIAL-1X2]  189.23,121.92 0 top
FD98  FIDUCIAL1X2  [FIDUCIAL-1X2]  189.23,121.92 0 bottom
FD99  FIDUCIAL1X2  [FIDUCIAL-1X2]  219.71,147.32 0 top
FD100  FIDUCIAL1X2  [FIDUCIAL-1X2]  219.71,147.32 0 bottom
H1  STAND-OFF  [STAND-OFF]  47.5,9.4 0 top
H2  STAND-OFF  [STAND-OFF]  11.94,32.26 0 top
H3  STAND-OFF  [STAND-OFF]  11.94,9.4 0 top
H4  STAND-OFF  [STAND-OFF]  47.5,32.26 0 top
H5  STAND-OFF  [STAND-OFF]  91.19,9.4 0 top
H6  STAND-OFF  [STAND-OFF]  55.63,32.26 0 top
H7  STAND-OFF  [STAND-OFF]  55.63,9.4 0 top
H8  STAND-OFF  [STAND-OFF]  91.19,32.26 0 top
H9  STAND-OFF  [STAND-OFF]  134.87,9.4 0 top
H10  STAND-OFF  [STAND-OFF]  99.31,32.26 0 top
H11  STAND-OFF  [STAND-OFF]  99.31,9.4 0 top
H12  STAND-OFF  [STAND-OFF]  134.87,32.26 0 top
H13  STAND-OFF  [STAND-OFF]  178.56,9.4 0 top
H14  STAND-OFF  [STAND-OFF]  143,32.26 0 top
H15  STAND-OFF  [STAND-OFF]  143,9.4 0 top
H16  STAND-OFF  [STAND-OFF]  178.56,32.26 0 top
H17  STAND-OFF  [STAND-OFF]  222.25,9.4 0 top
H18  STAND-OFF  [STAND-OFF]  186.69,32.26 0 top
H19  STAND-OFF  [STAND-OFF]  186.69,9.4 0 top
H20  STAND-OFF  [STAND-OFF]  222.25,32.26 0 top
H21  STAND-OFF  [STAND-OFF]  47.5,37.85 0 top
H22  STAND-OFF  [STAND-OFF]  11.94,60.71 0 top
H23  STAND-OFF  [STAND-OFF]  11.94,37.85 0 top
H24  STAND-OFF  [STAND-OFF]  47.5,60.71 0 top
H25  STAND-OFF  [STAND-OFF]  91.19,37.85 0 top
H26  STAND-OFF  [STAND-OFF]  55.63,60.71 0 top
H27  STAND-OFF  [STAND-OFF]  55.63,37.85 0 top
H28  STAND-OFF  [STAND-OFF]  91.19,60.71 0 top
H29  STAND-OFF  [STAND-OFF]  134.87,37.85 0 top
H30  STAND-OFF  [STAND-OFF]  99.31,60.71 0 top
H31  STAND-OFF  [STAND-OFF]  99.31,37.85 0 top
H32  STAND-OFF  [STAND-OFF]  134.87,60.71 0 top
H33  STAND-OFF  [STAND-OFF]  178.56,37.85 0 top
H34  STAND-OFF  [STAND-OFF]  143,60.71 0 top
H35  STAND-OFF  [STAND-OFF]  143,37.85 0 top
H36  STAND-OFF  [STAND-OFF]  178.56,60.71 0 top
H37  STAND-OFF  [STAND-OFF]  222.25,37.85 0 top
H38  STAND-OFF  [STAND-OFF]  186.69,60.71 0 top
H39  STAND-OFF  [STAND-OFF]  186.69,37.85 0 top
H40  STAND-OFF  [STAND-OFF]  222.25,60.71 0 top
H41  STAND-OFF  [STAND-OFF]  47.5,66.29 0 top
H42  STAND-OFF  [STAND-OFF]  11.94,89.15 0 top
H43  STAND-OFF  [STAND-OFF]  11.94,66.29 0 top
H44  STAND-OFF  [STAND-OFF]  47.5,89.15 0 top
H45  STAND-OFF  [STAND-OFF]  91.19,66.29 0 top
H46  STAND-OFF  [STAND-OFF]  55.63,89.15 0 top
H47  STAND-OFF  [STAND-OFF]  55.63,66.29 0 top
H48  STAND-OFF  [STAND-OFF]  91.19,89.15 0 top
H49  STAND-OFF  [STAND-OFF]  134.87,66.29 0 top
H50  STAND-OFF  [STAND-OFF]  99.31,89.15 0 top
H51  STAND-OFF  [STAND-OFF]  99.31,66.29 0 top
H52  STAND-OFF  [STAND-OFF]  134.87,89.15 0 top
H53  STAND-OFF  [STAND-OFF]  178.56,66.29 0 top
H54  STAND-OFF  [STAND-OFF]  143,89.15 0 top
H55  STAND-OFF  [STAND-OFF]  143,66.29 0 top
H56  STAND-OFF  [STAND-OFF]  178.56,89.15 0 top
H57  STAND-OFF  [STAND-OFF]  222.25,66.29 0 top
H58  STAND-OFF  [STAND-OFF]  186.69,89.15 0 top
H59  STAND-OFF  [STAND-OFF]  186.69,66.29 0 top
H60  STAND-OFF  [STAND-OFF]  222.25,89.15 0 top
H61  STAND-OFF  [STAND-OFF]  47.5,94.74 0 top
H62  STAND-OFF  [STAND-OFF]  11.94,117.6 0 top
H63  STAND-OFF  [STAND-OFF]  11.94,94.74 0 top
H64  STAND-OFF  [STAND-OFF]  47.5,117.6 0 top
H65  STAND-OFF  [STAND-OFF]  91.19,94.74 0 top
H66  STAND-OFF  [STAND-OFF]  55.63,117.6 0 top
H67  STAND-OFF  [STAND-OFF]  55.63,94.74 0 top
H68  STAND-OFF  [STAND-OFF]  91.19,117.6 0 top
H69  STAND-OFF  [STAND-OFF]  134.87,94.74 0 top
H70  STAND-OFF  [STAND-OFF]  99.31,117.6 0 top
H71  STAND-OFF  [STAND-OFF]  99.31,94.74 0 top
H72  STAND-OFF  [STAND-OFF]  134.87,117.6 0 top
H73  STAND-OFF  [STAND-OFF]  178.56,94.74 0 top
H74  STAND-OFF  [STAND-OFF]  143,117.6 0 top
H75  STAND-OFF  [STAND-OFF]  143,94.74 0 top
H76  STAND-OFF  [STAND-OFF]  178.56,117.6 0 top
H77  STAND-OFF  [STAND-OFF]  222.25,94.74 0 top
H78  STAND-OFF  [STAND-OFF]  186.69,117.6 0 top
H79  STAND-OFF  [STAND-OFF]  186.69,94.74 0 top
H80  STAND-OFF  [STAND-OFF]  222.25,117.6 0 top
H81  STAND-OFF  [STAND-OFF]  47.5,123.19 0 top
H82  STAND-OFF  [STAND-OFF]  11.94,146.05 0 top
H83  STAND-OFF  [STAND-OFF]  11.94,123.19 0 top
H84  STAND-OFF  [STAND-OFF]  47.5,146.05 0 top
H85  STAND-OFF  [STAND-OFF]  91.19,123.19 0 top
H86  STAND-OFF  [STAND-OFF]  55.63,146.05 0 top
H87  STAND-OFF  [STAND-OFF]  55.63,123.19 0 top
H88  STAND-OFF  [STAND-OFF]  91.19,146.05 0 top
H89  STAND-OFF  [STAND-OFF]  134.87,123.19 0 top
H90  STAND-OFF  [STAND-OFF]  99.31,146.05 0 top
H91  STAND-OFF  [STAND-OFF]  99.31,123.19 0 top
H92  STAND-OFF  [STAND-OFF]  134.87,146.05 0 top
H93  STAND-OFF  [STAND-OFF]  178.56,123.19 0 top
H94  STAND-OFF  [STAND-OFF]  143,146.05 0 top
H95  STAND-OFF  [STAND-OFF]  143,123.19 0 top
H96  STAND-OFF  [STAND-OFF]  178.56,146.05 0 top
H97  STAND-OFF  [STAND-OFF]  222.25,123.19 0 top
H98  STAND-OFF  [STAND-OFF]  186.69,146.05 0 top
H99  STAND-OFF  [STAND-OFF]  186.69,123.19 0 top
H100  STAND-OFF  [STAND-OFF]  222.25,146.05 0 top
I2C  JUMPER-SMT_3_2-NC_TRACE_SILK  [SMT-JUMPER_3_2-NC_TRACE_SILK]  15.75,14.48 180 top
I2C1  JUMPER-SMT_3_2-NC_TRACE_SILK  [SMT-JUMPER_3_2-NC_TRACE_SILK]  59.44,14.48 180 top
I2C2  JUMPER-SMT_3_2-NC_TRACE_SILK  [SMT-JUMPER_3_2-NC_TRACE_SILK]  103.12,14.48 180 top
I2C3  JUMPER-SMT_3_2-NC_TRACE_SILK  [SMT-JUMPER_3_2-NC_TRACE_SILK]  146.81,14.48 180 top
I2C4  JUMPER-SMT_3_2-NC_TRACE_SILK  [SMT-JUMPER_3_2-NC_TRACE_SILK]  190.5,14.48 180 top
I2C5  JUMPER-SMT_3_2-NC_TRACE_SILK  [SMT-JUMPER_3_2-NC_TRACE_SILK]  15.75,42.93 180 top
I2C6  JUMPER-SMT_3_2-NC_TRACE_SILK  [SMT-JUMPER_3_2-NC_TRACE_SILK]  59.44,42.93 180 top
I2C7  JUMPER-SMT_3_2-NC_TRACE_SILK  [SMT-JUMPER_3_2-NC_TRACE_SILK]  103.12,42.93 180 top
I2C8  JUMPER-SMT_3_2-NC_TRACE_SILK  [SMT-JUMPER_3_2-NC_TRACE_SILK]  146.81,42.93 180 top
I2C9  JUMPER-SMT_3_2-NC_TRACE_SILK  [SMT-JUMPER_3_2-NC_TRACE_SILK]  190.5,42.93 180 top
I2C10  JUMPER-SMT_3_2-NC_TRACE_SILK  [SMT-JUMPER_3_2-NC_TRACE_SILK]  15.75,71.37 180 top
I2C11  JUMPER-SMT_3_2-NC_TRACE_SILK  [SMT-JUMPER_3_2-NC_TRACE_SILK]  59.44,71.37 180 top
I2C12  JUMPER-SMT_3_2-NC_TRACE_SILK  [SMT-JUMPER_3_2-NC_TRACE_SILK]  103.12,71.37 180 top
I2C13  JUMPER-SMT_3_2-NC_TRACE_SILK  [SMT-JUMPER_3_2-NC_TRACE_SILK]  146.81,71.37 180 top
I2C14  JUMPER-SMT_3_2-NC_TRACE_SILK  [SMT-JUMPER_3_2-NC_TRACE_SILK]  190.5,71.37 180 top
I2C15  JUMPER-SMT_3_2-NC_TRACE_SILK  [SMT-JUMPER_3_2-NC_TRACE_SILK]  15.75,99.82 180 top
I2C16  JUMPER-SMT_3_2-NC_TRACE_SILK  [SMT-JUMPER_3_2-NC_TRACE_SILK]  59.44,99.82 180 top
I2C17  JUMPER-SMT_3_2-NC_TRACE_SILK  [SMT-JUMPER_3_2-NC_TRACE_SILK]  103.12,99.82 180 top
I2C18  JUMPER-SMT_3_2-NC_TRACE_SILK  [SMT-JUMPER_3_2-NC_TRACE_SILK]  146.81,99.82 180 top
I2C19  JUMPER-SMT_3_2-NC_TRACE_SILK  [SMT-JUMPER_3_2-NC_TRACE_SILK]  190.5,99.82 180 top
I2C20  JUMPER-SMT_3_2-NC_TRACE_SILK  [SMT-JUMPER_3_2-NC_TRACE_SILK]  15.75,128.27 180 top
I2C21  JUMPER-SMT_3_2-NC_TRACE_SILK  [SMT-JUMPER_3_2-NC_TRACE_SILK]  59.44,128.27 180 top
I2C22  JUMPER-SMT_3_2-NC_TRACE_SILK  [SMT-JUMPER_3_2-NC_TRACE_SILK]  103.12,128.27 180 top
I2C23  JUMPER-SMT_3_2-NC_TRACE_SILK  [SMT-JUMPER_3_2-NC_TRACE_SILK]  146.81,128.27 180 top
I2C24  JUMPER-SMT_3_2-NC_TRACE_SILK  [SMT-JUMPER_3_2-NC_TRACE_SILK]  190.5,128.27 180 top
IC1  [HT16K33]  28.45,20.83 180 top
IC2  [HT16K33]  72.14,20.83 180 top
IC3  [HT16K33]  115.82,20.83 180 top
IC4  [HT16K33]  159.51,20.83 180 top
IC5  [HT16K33]  203.2,20.83 180 top
IC6  [HT16K33]  28.45,49.28 180 top
IC7  [HT16K33]  72.14,49.28 180 top
IC8  [HT16K33]  115.82,49.28 180 top
IC9  [HT16K33]  159.51,49.28 180 top
IC10  [HT16K33]  203.2,49.28 180 top
IC11  [HT16K33]  28.45,77.72 180 top
IC12  [HT16K33]  72.14,77.72 180 top
IC13  [HT16K33]  115.82,77.72 180 top
IC14  [HT16K33]  159.51,77.72 180 top
IC15  [HT16K33]  203.2,77.72 180 top
IC16  [HT16K33]  28.45,106.17 180 top
IC17  [HT16K33]  72.14,106.17 180 top
IC18  [HT16K33]  115.82,106.17 180 top
IC19  [HT16K33]  159.51,106.17 180 top
IC20  [HT16K33]  203.2,106.17 180 top
IC21  [HT16K33]  28.45,134.62 180 top
IC22  [HT16K33]  72.14,134.62 180 top
IC23  [HT16K33]  115.82,134.62 180 top
IC24  [HT16K33]  159.51,134.62 180 top
IC25  [HT16K33]  203.2,134.62 180 top
J1  [1X04_NO_SILK]  82.3,17.02 90 top
J2  Vertical Qwiic Connector  [JST04_1MM_VERT]  53.72,25.27 270 top
J3  [1X04_NO_SILK]  38.61,17.02 90 top
J4  Vertical Qwiic Connector  [JST04_1MM_VERT]  10.03,25.27 270 top
J5  Vertical Qwiic Connector  [JST04_1MM_VERT]  49.15,16.38 90 top
J6  Vertical Qwiic Connector  [JST04_1MM_VERT]  92.84,16.38 90 top
J7  [1X04_NO_SILK]  125.98,17.02 90 top
J8  Vertical Qwiic Connector  [JST04_1MM_VERT]  97.41,25.27 270 top
J9  Vertical Qwiic Connector  [JST04_1MM_VERT]  136.53,16.38 90 top
J10  [1X04_NO_SILK]  169.67,17.02 90 top
J11  Vertical Qwiic Connector  [JST04_1MM_VERT]  141.1,25.27 270 top
J12  Vertical Qwiic Connector  [JST04_1MM_VERT]  180.21,16.38 90 top
J13  [1X04_NO_SILK]  213.36,17.02 90 top
J14  Vertical Qwiic Connector  [JST04_1MM_VERT]  184.78,25.27 270 top
J15  Vertical Qwiic Connector  [JST04_1MM_VERT]  223.9,16.38 90 top
J16  [1X04_NO_SILK]  38.61,45.47 90 top
J17  Vertical Qwiic Connector  [JST04_1MM_VERT]  10.03,53.72 270 top
J18  Vertical Qwiic Connector  [JST04_1MM_VERT]  49.15,44.83 90 top
J19  [1X04_NO_SILK]  82.3,45.47 90 top
J20  Vertical Qwiic Connector  [JST04_1MM_VERT]  53.72,53.72 270 top
J21  Vertical Qwiic Connector  [JST04_1MM_VERT]  92.84,44.83 90 top
J22  [1X04_NO_SILK]  125.98,45.47 90 top
J23  Vertical Qwiic Connector  [JST04_1MM_VERT]  97.41,53.72 270 top
J24  Vertical Qwiic Connector  [JST04_1MM_VERT]  136.53,44.83 90 top
J25  [1X04_NO_SILK]  169.67,45.47 90 top
J26  Vertical Qwiic Connector  [JST04_1MM_VERT]  141.1,53.72 270 top
J27  Vertical Qwiic Connector  [JST04_1MM_VERT]  180.21,44.83 90 top
J28  [1X04_NO_SILK]  213.36,45.47 90 top
J29  Vertical Qwiic Connector  [JST04_1MM_VERT]  184.78,53.72 270 top
J30  Vertical Qwiic Connector  [JST04_1MM_VERT]  223.9,44.83 90 top
J31  [1X04_NO_SILK]  38.61,73.91 90 top
J32  Vertical Qwiic Connector  [JST04_1MM_VERT]  10.03,82.17 270 top
J33  Vertical Qwiic Connector  [JST04_1MM_VERT]  49.15,73.28 90 top
J34  [1X04_NO_SILK]  82.3,73.91 90 top
J35  Vertical Qwiic Connector  [JST04_1MM_VERT]  53.72,82.17 270 top
J36  Vertical Qwiic Connector  [JST04_1MM_VERT]  92.84,73.28 90 top
J37  [1X04_NO_SILK]  125.98,73.91 90 top
J38  Vertical Qwiic Connector  [JST04_1MM_VERT]  97.41,82.17 270 top
J39  Vertical Qwiic Connector  [JST04_1MM_VERT]  136.53,73.28 90 top
J40  [1X04_NO_SILK]  169.67,73.91 90 top
J41  Vertical Qwiic Connector  [JST04_1MM_VERT]  141.1,82.17 270 top
J42  Vertical Qwiic Connector  [JST04_1MM_VERT]  180.21,73.28 90 top
J43  [1X04_NO_SILK]  213.36,73.91 90 top
J44  Vertical Qwiic Connector  [JST04_1MM_VERT]  184.78,82.17 270 top
J45  Vertical Qwiic Connector  [JST04_1MM_VERT]  223.9,73.28 90 top
J46  [1X04_NO_SILK]  38.61,102.36 90 top
J47  Vertical Qwiic Connector  [JST04_1MM_VERT]  10.03,110.62 270 top
J48  Vertical Qwiic Connector  [JST04_1MM_VERT]  49.15,101.73 90 top
J49  [1X04_NO_SILK]  82.3,102.36 90 top
J50  Vertical Qwiic Connector  [JST04_1MM_VERT]  53.72,110.62 270 top
J51  Vertical Qwiic Connector  [JST04_1MM_VERT]  92.84,101.73 90 top
J52  [1X04_NO_SILK]  125.98,102.36 90 top
J53  Vertical Qwiic Connector  [JST04_1MM_VERT]  97.41,110.62 270 top
J54  Vertical Qwiic Connector  [JST04_1MM_VERT]  136.53,101.73 90 top
J55  [1X04_NO_SILK]  169.67,102.36 90 top
J56  Vertical Qwiic Connector  [JST04_1MM_VERT]  141.1,110.62 270 top
J57  Vertical Qwiic Connector  [JST04_1MM_VERT]  180.21,101.73 90 top
J58  [1X04_NO_SILK]  213.36,102.36 90 top
J59  Vertical Qwiic Connector  [JST04_1MM_VERT]  184.78,110.62 270 top
J60  Vertical Qwiic Connector  [JST04_1MM_VERT]  223.9,101.73 90 top
J61  [1X04_NO_SILK]  38.61,130.81 90 top
J62  Vertical Qwiic Connector  [JST04_1MM_VERT]  10.03,139.06 270 top
J63  Vertical Qwiic Connector  [JST04_1MM_VERT]  49.15,130.17 90 top
J64  [1X04_NO_SILK]  82.3,130.81 90 top
J65  Vertical Qwiic Connector  [JST04_1MM_VERT]  53.72,139.06 270 top
J66  Vertical Qwiic Connector  [JST04_1MM_VERT]  92.84,130.17 90 top
J67  [1X04_NO_SILK]  125.98,130.81 90 top
J68  Vertical Qwiic Connector  [JST04_1MM_VERT]  97.41,139.06 270 top
J69  Vertical Qwiic Connector  [JST04_1MM_VERT]  136.53,130.17 90 top
J70  [1X04_NO_SILK]  169.67,130.81 90 top
J71  Vertical Qwiic Connector  [JST04_1MM_VERT]  141.1,139.06 270 top
J72  Vertical Qwiic Connector  [JST04_1MM_VERT]  180.21,130.17 90 top
J73  [1X04_NO_SILK]  213.36,130.81 90 top
J74  Vertical Qwiic Connector  [JST04_1MM_VERT]  184.78,139.06 270 top
J75  Vertical Qwiic Connector  [JST04_1MM_VERT]  223.9,130.17 90 top
LOGO1  OSHW-LOGOMINI  [OSHW-LOGO-MINI]  43.69,9.4 0 top
LOGO2  OSHW-LOGOMINI  [OSHW-LOGO-MINI]  87.38,9.4 0 top
LOGO3  OSHW-LOGOMINI  [OSHW-LOGO-MINI]  131.06,9.4 0 top
LOGO4  OSHW-LOGOMINI  [OSHW-LOGO-MINI]  174.75,9.4 0 top
LOGO5  OSHW-LOGOMINI  [OSHW-LOGO-MINI]  218.44,9.4 0 top
LOGO6  OSHW-LOGOMINI  [OSHW-LOGO-MINI]  43.69,37.85 0 top
LOGO7  OSHW-LOGOMINI  [OSHW-LOGO-MINI]  87.38,37.85 0 top
LOGO8  OSHW-LOGOMINI  [OSHW-LOGO-MINI]  131.06,37.85 0 top
LOGO9  OSHW-LOGOMINI  [OSHW-LOGO-MINI]  174.75,37.85 0 top
LOGO10  OSHW-LOGOMINI  [OSHW-LOGO-MINI]  218.44,37.85 0 top
LOGO11  OSHW-LOGOMINI  [OSHW-LOGO-MINI]  43.69,66.29 0 top
LOGO12  OSHW-LOGOMINI  [OSHW-LOGO-MINI]  87.38,66.29 0 top
LOGO13  OSHW-LOGOMINI  [OSHW-LOGO-MINI]  131.06,66.29 0 top
LOGO14  OSHW-LOGOMINI  [OSHW-LOGO-MINI]  174.75,66.29 0 top
LOGO15  OSHW-LOGOMINI  [OSHW-LOGO-MINI]  218.44,66.29 0 top
LOGO16  OSHW-LOGOMINI  [OSHW-LOGO-MINI]  43.69,94.74 0 top
LOGO17  OSHW-LOGOMINI  [OSHW-LOGO-MINI]  87.38,94.74 0 top
LOGO18  OSHW-LOGOMINI  [OSHW-LOGO-MINI]  131.06,94.74 0 top
LOGO19  OSHW-LOGOMINI  [OSHW-LOGO-MINI]  174.75,94.74 0 top
LOGO20  OSHW-LOGOMINI  [OSHW-LOGO-MINI]  218.44,94.74 0 top
LOGO21  OSHW-LOGOMINI  [OSHW-LOGO-MINI]  43.69,123.19 0 top
LOGO22  OSHW-LOGOMINI  [OSHW-LOGO-MINI]  87.38,123.19 0 top
LOGO23  OSHW-LOGOMINI  [OSHW-LOGO-MINI]  131.06,123.19 0 top
LOGO24  OSHW-LOGOMINI  [OSHW-LOGO-MINI]  174.75,123.19 0 top
LOGO25  OSHW-LOGOMINI  [OSHW-LOGO-MINI]  218.44,123.19 0 top
R1  1k  [0603]  13.21,17.65 180 top
R2  39k  [0603]  48.13,24.64 0 top
R3  39k  [0603]  48.13,25.91 0 top
R4  2.2k  [0603]  11.94,14.48 0 top
R5  2.2k  [0603]  19.56,14.48 180 top
R6  1k  [0603]  56.9,17.65 180 top
R7  2.2k  [0603]  55.63,14.48 0 top
R8  2.2k  [0603]  63.25,14.48 180 top
R9  39k  [0603]  91.82,24.64 0 top
R10  39k  [0603]  91.82,25.91 0 top
R11  1k  [0603]  100.58,17.65 180 top
R12  2.2k  [0603]  99.31,14.48 0 top
R13  2.2k  [0603]  106.93,14.48 180 top
R14  39k  [0603]  135.51,24.64 0 top
R15  39k  [0603]  135.51,25.91 0 top
R16  1k  [0603]  144.27,17.65 180 top
R17  2.2k  [0603]  143,14.48 0 top
R18  2.2k  [0603]  150.62,14.48 180 top
R19  39k  [0603]  179.2,24.64 0 top
R20  39k  [0603]  179.2,25.91 0 top
R21  1k  [0603]  187.96,17.65 180 top
R22  2.2k  [0603]  186.69,14.48 0 top
R23  2.2k  [0603]  194.31,14.48 180 top
R24  39k  [0603]  222.88,24.64 0 top
R25  39k  [0603]  222.88,25.91 0 top
R26  1k  [0603]  13.21,46.1 180 top
R27  2.2k  [0603]  11.94,42.93 0 top
R28  2.2k  [0603]  19.56,42.93 180 top
R29  39k  [0603]  48.13,53.09 0 top
R30  39k  [0603]  48.13,54.36 0 top
R31  1k  [0603]  56.9,46.1 180 top
R32  2.2k  [0603]  55.63,42.93 0 top
R33  2.2k  [0603]  63.25,42.93 180 top
R34  39k  [0603]  91.82,53.09 0 top
R35  39k  [0603]  91.82,54.36 0 top
R36  1k  [0603]  100.58,46.1 180 top
R37  2.2k  [0603]  99.31,42.93 0 top
R38  2.2k  [0603]  106.93,42.93 180 top
R39  39k  [0603]  135.51,53.09 0 top
R40  39k  [0603]  135.51,54.36 0 top
R41  1k  [0603]  144.27,46.1 180 top
R42  2.2k  [0603]  143,42.93 0 top
R43  2.2k  [0603]  150.62,42.93 180 top
R44  39k  [0603]  179.2,53.09 0 top
R45  39k  [0603]  179.2,54.36 0 top
R46  1k  [0603]  187.96,46.1 180 top
R47  2.2k  [0603]  186.69,42.93 0 top
R48  2.2k  [0603]  194.31,42.93 180 top
R49  39k  [0603]  222.88,53.09 0 top
R50  39k  [0603]  222.88,54.36 0 top
R51  1k  [0603]  13.21,74.55 180 top
R52  2.2k  [0603]  11.94,71.37 0 top
R53  2.2k  [0603]  19.56,71.37 180 top
R54  39k  [0603]  48.13,81.53 0 top
R55  39k  [0603]  48.13,82.8 0 top
R56  1k  [0603]  56.9,74.55 180 top
R57  2.2k  [0603]  55.63,71.37 0 top
R58  2.2k  [0603]  63.25,71.37 180 top
R59  39k  [0603]  91.82,81.53 0 top
R60  39k  [0603]  91.82,82.8 0 top
R61  1k  [0603]  100.58,74.55 180 top
R62  2.2k  [0603]  99.31,71.37 0 top
R63  2.2k  [0603]  106.93,71.37 180 top
R64  39k  [0603]  135.51,81.53 0 top
R65  39k  [0603]  135.51,82.8 0 top
R66  1k  [0603]  144.27,74.55 180 top
R67  2.2k  [0603]  143,71.37 0 top
R68  2.2k  [0603]  150.62,71.37 180 top
R69  39k  [0603]  179.2,81.53 0 top
R70  39k  [0603]  179.2,82.8 0 top
R71  1k  [0603]  187.96,74.55 180 top
R72  2.2k  [0603]  186.69,71.37 0 top
R73  2.2k  [0603]  194.31,71.37 180 top
R74  39k  [0603]  222.88,81.53 0 top
R75  39k  [0603]  222.88,82.8 0 top
R76  1k  [0603]  13.21,103 180 top
R77  2.2k  [0603]  11.94,99.82 0 top
R78  2.2k  [0603]  19.56,99.82 180 top
R79  39k  [0603]  48.13,109.98 0 top
R80  39k  [0603]  48.13,111.25 0 top
R81  1k  [0603]  56.9,103 180 top
R82  2.2k  [0603]  55.63,99.82 0 top
R83  2.2k  [0603]  63.25,99.82 180 top
R84  39k  [0603]  91.82,109.98 0 top
R85  39k  [0603]  91.82,111.25 0 top
R86  1k  [0603]  100.58,103 180 top
R87  2.2k  [0603]  99.31,99.82 0 top
R88  2.2k  [0603]  106.93,99.82 180 top
R89  39k  [0603]  135.51,109.98 0 top
R90  39k  [0603]  135.51,111.25 0 top
R91  1k  [0603]  144.27,103 180 top
R92  2.2k  [0603]  143,99.82 0 top
R93  2.2k  [0603]  150.62,99.82 180 top
R94  39k  [0603]  179.2,109.98 0 top
R95  39k  [0603]  179.2,111.25 0 top
R96  1k  [0603]  187.96,103 180 top
R97  2.2k  [0603]  186.69,99.82 0 top
R98  2.2k  [0603]  194.31,99.82 180 top
R99  39k  [0603]  222.88,109.98 0 top
R100  39k  [0603]  222.88,111.25 0 top
R101  1k  [0603]  13.21,131.44 180 top
R102  2.2k  [0603]  11.94,128.27 0 top
R103  2.2k  [0603]  19.56,128.27 180 top
R104  39k  [0603]  48.13,138.43 0 top
R105  39k  [0603]  48.13,139.7 0 top
R106  1k  [0603]  56.9,131.44 180 top
R107  2.2k  [0603]  55.63,128.27 0 top
R108  2.2k  [0603]  63.25,128.27 180 top
R109  39k  [0603]  91.82,138.43 0 top
R110  39k  [0603]  91.82,139.7 0 top
R111  1k  [0603]  100.58,131.44 180 top
R112  2.2k  [0603]  99.31,128.27 0 top
R113  2.2k  [0603]  106.93,128.27 180 top
R114  39k  [0603]  135.51,138.43 0 top
R115  39k  [0603]  135.51,139.7 0 top
R116  1k  [0603]  144.27,131.44 180 top
R117  2.2k  [0603]  143,128.27 0 top
R118  2.2k  [0603]  150.62,128.27 180 top
R119  39k  [0603]  179.2,138.43 0 top
R120  39k  [0603]  179.2,139.7 0 top
R121  1k  [0603]  187.96,131.44 180 top
R122  2.2k  [0603]  186.69,128.27 0 top
R123  2.2k  [0603]  194.31,128.27 180 top
R124  39k  [0603]  222.88,138.43 0 top
R125  39k  [0603]  222.88,139.7 0 top
U1  [SILSMART_DISPLAY]  29.72,20.83 0 bottom
U2  [SILSMART_DISPLAY]  73.41,20.83 0 bottom
U3  [SILSMART_DISPLAY]  117.09,20.83 0 bottom
U4  [SILSMART_DISPLAY]  160.78,20.83 0 bottom
U5  [SILSMART_DISPLAY]  204.47,20.83 0 bottom
U6  [SILSMART_DISPLAY]  29.72,49.28 0 bottom
U7  [SILSMART_DISPLAY]  73.41,49.28 0 bottom
U8  [SILSMART_DISPLAY]  117.09,49.28 0 bottom
U9  [SILSMART_DISPLAY]  160.78,49.28 0 bottom
U10  [SILSMART_DISPLAY]  204.47,49.28 0 bottom
U11  [SILSMART_DISPLAY]  29.72,77.72 0 bottom
U12  [SILSMART_DISPLAY]  73.41,77.72 0 bottom
U13  [SILSMART_DISPLAY]  117.09,77.72 0 bottom
U14  [SILSMART_DISPLAY]  160.78,77.72 0 bottom
U15  [SILSMART_DISPLAY]  204.47,77.72 0 bottom
U16  [SILSMART_DISPLAY]  29.72,106.17 0 bottom
U17  [SILSMART_DISPLAY]  73.41,106.17 0 bottom
U18  [SILSMART_DISPLAY]  117.09,106.17 0 bottom
U19  [SILSMART_DISPLAY]  160.78,106.17 0 bottom
U20  [SILSMART_DISPLAY]  204.47,106.17 0 bottom
U21  [SILSMART_DISPLAY]  29.72,134.62 0 bottom
U22  [SILSMART_DISPLAY]  73.41,134.62 0 bottom
U23  [SILSMART_DISPLAY]  117.09,134.62 0 bottom
U24  [SILSMART_DISPLAY]  160.78,134.62 0 bottom
U25  [SILSMART_DISPLAY]  204.47,134.62 0 bottom
U$1  [32]  38.99,18.54 0 top
U$2  [C0]  38.99,24.64 0 top
U$3  [PWR5]  10.67,16.89 90 top
U$4  [D1]  38.99,23.24 0 top
U$5  [G3]  38.86,17.02 0 top
U$6  [QWIIC_4MM]  17.02,27.81 0 top
U$7  SPARKX-LOGO4  [SPARKX-MEDIUM]  19.56,32.26 0 top
U$8  SPARKX-LOGO4  [SPARKX-MEDIUM]  39.88,32.26 0 bottom
U$9  [PWR5]  54.36,16.89 90 top
U$10  [I_SUPER2_C-()-04]  19.56,15.24 90 top
U$11  [I_SUPER2_C-()-04]  63.25,15.24 90 top
U$12  [QWIIC_ALPHANUMERIC0]  68.33,32.77 0 top
U$13  [QWIIC_ALPHANUMERIC0]  34.04,32.77 0 bottom
U$14  [DISPLAY1]  74.68,30.86 0 top
U$15  [QWIIC_ALPHANUMERIC0]  24.64,32.77 0 top
U$16  [DISPLAY1]  30.99,30.86 0 top
U$17  [DISPLAY1]  27.81,30.86 0 bottom
U$18  MOUNTING_HOLE_M2-0.4X6  [MOUNTING_HOLE_M2-0.4X6]  42.42,20.83 0 top
U$19  MOUNTING_HOLE_M2-0.4X6  [MOUNTING_HOLE_M2-0.4X6]  17.02,20.83 0 top
U$20  [A00]  46.1,27.56 0 top
U$21  [A11]  43.94,22.48 0 top
U$22  [QWIIC_ALPHANUMERIC0]  77.72,32.77 0 bottom
U$23  [DISPLAY1]  71.5,30.86 0 bottom
U$24  MOUNTING_HOLE_M2-0.4X6  [MOUNTING_HOLE_M2-0.4X6]  86.11,20.83 0 top
U$25  MOUNTING_HOLE_M2-0.4X6  [MOUNTING_HOLE_M2-0.4X6]  60.71,20.83 0 top
U$26  [A00]  89.79,27.56 0 top
U$27  [A11]  87.63,22.48 0 top
U$28  [QWIIC_4MM]  60.71,27.81 0 top
U$29  [32]  82.68,18.54 0 top
U$30  [C0]  82.68,24.64 0 top
U$31  [D1]  82.68,23.24 0 top
U$32  [G3]  82.55,17.02 0 top
U$33  SPARKX-LOGO4  [SPARKX-MEDIUM]  63.25,32.26 0 top
U$34  SPARKX-LOGO4  [SPARKX-MEDIUM]  83.57,32.26 0 bottom
U$35  [PWR5]  98.04,16.89 90 top
U$36  [I_SUPER2_C-()-04]  106.93,15.24 90 top
U$37  [QWIIC_ALPHANUMERIC0]  112.01,32.77 0 top
U$38  [DISPLAY1]  118.36,30.86 0 top
U$39  [QWIIC_ALPHANUMERIC0]  121.41,32.77 0 bottom
U$40  [DISPLAY1]  115.19,30.86 0 bottom
U$41  MOUNTING_HOLE_M2-0.4X6  [MOUNTING_HOLE_M2-0.4X6]  129.79,20.83 0 top
U$42  MOUNTING_HOLE_M2-0.4X6  [MOUNTING_HOLE_M2-0.4X6]  104.39,20.83 0 top
U$43  [A00]  133.48,27.56 0 top
U$44  [A11]  131.32,22.48 0 top
U$45  [QWIIC_4MM]  104.39,27.81 0 top
U$46  [32]  126.36,18.54 0 top
U$47  [C0]  126.36,24.64 0 top
U$48  [D1]  126.36,23.24 0 top
U$49  [G3]  126.24,17.02 0 top
U$50  SPARKX-LOGO4  [SPARKX-MEDIUM]  106.93,32.26 0 top
U$51  SPARKX-LOGO4  [SPARKX-MEDIUM]  127.25,32.26 0 bottom
U$52  [PWR5]  141.73,16.89 90 top
U$53  [I_SUPER2_C-()-04]  150.62,15.24 90 top
U$54  [QWIIC_ALPHANUMERIC0]  155.7,32.77 0 top
U$55  [DISPLAY1]  162.05,30.86 0 top
U$56  [QWIIC_ALPHANUMERIC0]  165.1,32.77 0 bottom
U$57  [DISPLAY1]  158.88,30.86 0 bottom
U$58  MOUNTING_HOLE_M2-0.4X6  [MOUNTING_HOLE_M2-0.4X6]  173.48,20.83 0 top
U$59  MOUNTING_HOLE_M2-0.4X6  [MOUNTING_HOLE_M2-0.4X6]  148.08,20.83 0 top
U$60  [A00]  177.16,27.56 0 top
U$61  [A11]  175.01,22.48 0 top
U$62  [QWIIC_4MM]  148.08,27.81 0 top
U$63  [32]  170.05,18.54 0 top
U$64  [C0]  170.05,24.64 0 top
U$65  [D1]  170.05,23.24 0 top
U$66  [G3]  169.93,17.02 0 top
U$67  SPARKX-LOGO4  [SPARKX-MEDIUM]  150.62,32.26 0 top
U$68  SPARKX-LOGO4  [SPARKX-MEDIUM]  170.94,32.26 0 bottom
U$69  [PWR5]  185.42,16.89 90 top
U$70  [I_SUPER2_C-()-04]  194.31,15.24 90 top
U$71  [QWIIC_ALPHANUMERIC0]  199.39,32.77 0 top
U$72  [DISPLAY1]  205.74,30.86 0 top
U$73  [QWIIC_ALPHANUMERIC0]  208.79,32.77 0 bottom
U$74  [DISPLAY1]  202.56,30.86 0 bottom
U$75  MOUNTING_HOLE_M2-0.4X6  [MOUNTING_HOLE_M2-0.4X6]  217.17,20.83 0 top
U$76  MOUNTING_HOLE_M2-0.4X6  [MOUNTING_HOLE_M2-0.4X6]  191.77,20.83 0 top
U$77  [A00]  220.85,27.56 0 top
U$78  [A11]  218.69,22.48 0 top
U$79  [QWIIC_4MM]  191.77,27.81 0 top
U$80  [32]  213.74,18.54 0 top
U$81  [C0]  213.74,24.64 0 top
U$82  [D1]  213.74,23.24 0 top
U$83  [G3]  213.61,17.02 0 top
U$84  SPARKX-LOGO4  [SPARKX-MEDIUM]  194.31,32.26 0 top
U$85  SPARKX-LOGO4  [SPARKX-MEDIUM]  214.63,32.26 0 bottom
U$86  [PWR5]  10.67,45.34 90 top
U$87  [I_SUPER2_C-()-04]  19.56,43.69 90 top
U$88  [QWIIC_ALPHANUMERIC0]  24.64,61.21 0 top
U$89  [DISPLAY1]  30.99,59.31 0 top
U$90  [QWIIC_ALPHANUMERIC0]  34.04,61.21 0 bottom
U$91  [DISPLAY1]  27.81,59.31 0 bottom
U$92  MOUNTING_HOLE_M2-0.4X6  [MOUNTING_HOLE_M2-0.4X6]  42.42,49.28 0 top
U$93  MOUNTING_HOLE_M2-0.4X6  [MOUNTING_HOLE_M2-0.4X6]  17.02,49.28 0 top
U$94  [A00]  46.1,56.01 0 top
U$95  [A11]  43.94,50.93 0 top
U$96  [QWIIC_4MM]  17.02,56.26 0 top
U$97  [32]  38.99,46.99 0 top
U$98  [C0]  38.99,53.09 0 top
U$99  [D1]  38.99,51.69 0 top
U$100  [G3]  38.86,45.47 0 top
U$101  SPARKX-LOGO4  [SPARKX-MEDIUM]  19.56,60.71 0 top
U$102  SPARKX-LOGO4  [SPARKX-MEDIUM]  39.88,60.71 0 bottom
U$103  [PWR5]  54.36,45.34 90 top
U$104  [I_SUPER2_C-()-04]  63.25,43.69 90 top
U$105  [QWIIC_ALPHANUMERIC0]  68.33,61.21 0 top
U$106  [DISPLAY1]  74.68,59.31 0 top
U$107  [QWIIC_ALPHANUMERIC0]  77.72,61.21 0 bottom
U$108  [DISPLAY1]  71.5,59.31 0 bottom
U$109  MOUNTING_HOLE_M2-0.4X6  [MOUNTING_HOLE_M2-0.4X6]  86.11,49.28 0 top
U$110  MOUNTING_HOLE_M2-0.4X6  [MOUNTING_HOLE_M2-0.4X6]  60.71,49.28 0 top
U$111  [A00]  89.79,56.01 0 top
U$112  [A11]  87.63,50.93 0 top
U$113  [QWIIC_4MM]  60.71,56.26 0 top
U$114  [32]  82.68,46.99 0 top
U$115  [C0]  82.68,53.09 0 top
U$116  [D1]  82.68,51.69 0 top
U$117  [G3]  82.55,45.47 0 top
U$118  SPARKX-LOGO4  [SPARKX-MEDIUM]  63.25,60.71 0 top
U$119  SPARKX-LOGO4  [SPARKX-MEDIUM]  83.57,60.71 0 bottom
U$120  [PWR5]  98.04,45.34 90 top
U$121  [I_SUPER2_C-()-04]  106.93,43.69 90 top
U$122  [QWIIC_ALPHANUMERIC0]  112.01,61.21 0 top
U$123  [DISPLAY1]  118.36,59.31 0 top
U$124  [QWIIC_ALPHANUMERIC0]  121.41,61.21 0 bottom
U$125  [DISPLAY1]  115.19,59.31 0 bottom
U$126  MOUNTING_HOLE_M2-0.4X6  [MOUNTING_HOLE_M2-0.4X6]  129.79,49.28 0 top
U$127  MOUNTING_HOLE_M2-0.4X6  [MOUNTING_HOLE_M2-0.4X6]  104.39,49.28 0 top
U$128  [A00]  133.48,56.01 0 top
U$129  [A11]  131.32,50.93 0 top
U$130  [QWIIC_4MM]  104.39,56.26 0 top
U$131  [32]  126.36,46.99 0 top
U$132  [C0]  126.36,53.09 0 top
U$133  [D1]  126.36,51.69 0 top
U$134  [G3]  126.24,45.47 0 top
U$135  SPARKX-LOGO4  [SPARKX-MEDIUM]  106.93,60.71 0 top
U$136  SPARKX-LOGO4  [SPARKX-MEDIUM]  127.25,60.71 0 bottom
U$137  [PWR5]  141.73,45.34 90 top
U$138  [I_SUPER2_C-()-04]  150.62,43.69 90 top
U$139  [QWIIC_ALPHANUMERIC0]  155.7,61.21 0 top
U$140  [DISPLAY1]  162.05,59.31 0 top
U$141  [QWIIC_ALPHANUMERIC0]  165.1,61.21 0 bottom
U$142  [DISPLAY1]  158.88,59.31 0 bottom
U$143  MOUNTING_HOLE_M2-0.4X6  [MOUNTING_HOLE_M2-0.4X6]  173.48,49.28 0 top
U$144  MOUNTING_HOLE_M2-0.4X6  [MOUNTING_HOLE_M2-0.4X6]  148.08,49.28 0 top
U$145  [A00]  177.16,56.01 0 top
U$146  [A11]  175.01,50.93 0 top
U$147  [QWIIC_4MM]  148.08,56.26 0 top
U$148  [32]  170.05,46.99 0 top
U$149  [C0]  170.05,53.09 0 top
U$150  [D1]  170.05,51.69 0 top
U$151  [G3]  169.93,45.47 0 top
U$152  SPARKX-LOGO4  [SPARKX-MEDIUM]  150.62,60.71 0 top
U$153  SPARKX-LOGO4  [SPARKX-MEDIUM]  170.94,60.71 0 bottom
U$154  [PWR5]  185.42,45.34 90 top
U$155  [I_SUPER2_C-()-04]  194.31,43.69 90 top
U$156  [QWIIC_ALPHANUMERIC0]  199.39,61.21 0 top
U$157  [DISPLAY1]  205.74,59.31 0 top
U$158  [QWIIC_ALPHANUMERIC0]  208.79,61.21 0 bottom
U$159  [DISPLAY1]  202.56,59.31 0 bottom
U$160  MOUNTING_HOLE_M2-0.4X6  [MOUNTING_HOLE_M2-0.4X6]  217.17,49.28 0 top
U$161  MOUNTING_HOLE_M2-0.4X6  [MOUNTING_HOLE_M2-0.4X6]  191.77,49.28 0 top
U$162  [A00]  220.85,56.01 0 top
U$163  [A11]  218.69,50.93 0 top
U$164  [QWIIC_4MM]  191.77,56.26 0 top
U$165  [32]  213.74,46.99 0 top
U$166  [C0]  213.74,53.09 0 top
U$167  [D1]  213.74,51.69 0 top
U$168  [G3]  213.61,45.47 0 top
U$169  SPARKX-LOGO4  [SPARKX-MEDIUM]  194.31,60.71 0 top
U$170  SPARKX-LOGO4  [SPARKX-MEDIUM]  214.63,60.71 0 bottom
U$171  [PWR5]  10.67,73.79 90 top
U$172  [I_SUPER2_C-()-04]  19.56,72.14 90 top
U$173  [QWIIC_ALPHANUMERIC0]  24.64,89.66 0 top
U$174  [DISPLAY1]  30.99,87.76 0 top
U$175  [QWIIC_ALPHANUMERIC0]  34.04,89.66 0 bottom
U$176  [DISPLAY1]  27.81,87.76 0 bottom
U$177  MOUNTING_HOLE_M2-0.4X6  [MOUNTING_HOLE_M2-0.4X6]  42.42,77.72 0 top
U$178  MOUNTING_HOLE_M2-0.4X6  [MOUNTING_HOLE_M2-0.4X6]  17.02,77.72 0 top
U$179  [A00]  46.1,84.45 0 top
U$180  [A11]  43.94,79.38 0 top
U$181  [QWIIC_4MM]  17.02,84.71 0 top
U$182  [32]  38.99,75.44 0 top
U$183  [C0]  38.99,81.53 0 top
U$184  [D1]  38.99,80.14 0 top
U$185  [G3]  38.86,73.91 0 top
U$186  SPARKX-LOGO4  [SPARKX-MEDIUM]  19.56,89.15 0 top
U$187  SPARKX-LOGO4  [SPARKX-MEDIUM]  39.88,89.15 0 bottom
U$188  [PWR5]  54.36,73.79 90 top
U$189  [I_SUPER2_C-()-04]  63.25,72.14 90 top
U$190  [QWIIC_ALPHANUMERIC0]  68.33,89.66 0 top
U$191  [DISPLAY1]  74.68,87.76 0 top
U$192  [QWIIC_ALPHANUMERIC0]  77.72,89.66 0 bottom
U$193  [DISPLAY1]  71.5,87.76 0 bottom
U$194  MOUNTING_HOLE_M2-0.4X6  [MOUNTING_HOLE_M2-0.4X6]  86.11,77.72 0 top
U$195  MOUNTING_HOLE_M2-0.4X6  [MOUNTING_HOLE_M2-0.4X6]  60.71,77.72 0 top
U$196  [A00]  89.79,84.45 0 top
U$197  [A11]  87.63,79.38 0 top
U$198  [QWIIC_4MM]  60.71,84.71 0 top
U$199  [32]  82.68,75.44 0 top
U$200  [C0]  82.68,81.53 0 top
U$201  [D1]  82.68,80.14 0 top
U$202  [G3]  82.55,73.91 0 top
U$203  SPARKX-LOGO4  [SPARKX-MEDIUM]  63.25,89.15 0 top
U$204  SPARKX-LOGO4  [SPARKX-MEDIUM]  83.57,89.15 0 bottom
U$205  [PWR5]  98.04,73.79 90 top
U$206  [I_SUPER2_C-()-04]  106.93,72.14 90 top
U$207  [QWIIC_ALPHANUMERIC0]  112.01,89.66 0 top
U$208  [DISPLAY1]  118.36,87.76 0 top
U$209  [QWIIC_ALPHANUMERIC0]  121.41,89.66 0 bottom
U$210  [DISPLAY1]  115.19,87.76 0 bottom
U$211  MOUNTING_HOLE_M2-0.4X6  [MOUNTING_HOLE_M2-0.4X6]  129.79,77.72 0 top
U$212  MOUNTING_HOLE_M2-0.4X6  [MOUNTING_HOLE_M2-0.4X6]  104.39,77.72 0 top
U$213  [A00]  133.48,84.45 0 top
U$214  [A11]  131.32,79.38 0 top
U$215  [QWIIC_4MM]  104.39,84.71 0 top
U$216  [32]  126.36,75.44 0 top
U$217  [C0]  126.36,81.53 0 top
U$218  [D1]  126.36,80.14 0 top
U$219  [G3]  126.24,73.91 0 top
U$220  SPARKX-LOGO4  [SPARKX-MEDIUM]  106.93,89.15 0 top
U$221  SPARKX-LOGO4  [SPARKX-MEDIUM]  127.25,89.15 0 bottom
U$222  [PWR5]  141.73,73.79 90 top
U$223  [I_SUPER2_C-()-04]  150.62,72.14 90 top
U$224  [QWIIC_ALPHANUMERIC0]  155.7,89.66 0 top
U$225  [DISPLAY1]  162.05,87.76 0 top
U$226  [QWIIC_ALPHANUMERIC0]  165.1,89.66 0 bottom
U$227  [DISPLAY1]  158.88,87.76 0 bottom
U$228  MOUNTING_HOLE_M2-0.4X6  [MOUNTING_HOLE_M2-0.4X6]  173.48,77.72 0 top
U$229  MOUNTING_HOLE_M2-0.4X6  [MOUNTING_HOLE_M2-0.4X6]  148.08,77.72 0 top
U$230  [A00]  177.16,84.45 0 top
U$231  [A11]  175.01,79.38 0 top
U$232  [QWIIC_4MM]  148.08,84.71 0 top
U$233  [32]  170.05,75.44 0 top
U$234  [C0]  170.05,81.53 0 top
U$235  [D1]  170.05,80.14 0 top
U$236  [G3]  169.93,73.91 0 top
U$237  SPARKX-LOGO4  [SPARKX-MEDIUM]  150.62,89.15 0 top
U$238  SPARKX-LOGO4  [SPARKX-MEDIUM]  170.94,89.15 0 bottom
U$239  [PWR5]  185.42,73.79 90 top
U$240  [I_SUPER2_C-()-04]  194.31,72.14 90 top
U$241  [QWIIC_ALPHANUMERIC0]  199.39,89.66 0 top
U$242  [DISPLAY1]  205.74,87.76 0 top
U$243  [QWIIC_ALPHANUMERIC0]  208.79,89.66 0 bottom
U$244  [DISPLAY1]  202.56,87.76 0 bottom
U$245  MOUNTING_HOLE_M2-0.4X6  [MOUNTING_HOLE_M2-0.4X6]  217.17,77.72 0 top
U$246  MOUNTING_HOLE_M2-0.4X6  [MOUNTING_HOLE_M2-0.4X6]  191.77,77.72 0 top
U$247  [A00]  220.85,84.45 0 top
U$248  [A11]  218.69,79.38 0 top
U$249  [QWIIC_4MM]  191.77,84.71 0 top
U$250  [32]  213.74,75.44 0 top
U$251  [C0]  213.74,81.53 0 top
U$252  [D1]  213.74,80.14 0 top
U$253  [G3]  213.61,73.91 0 top
U$254  SPARKX-LOGO4  [SPARKX-MEDIUM]  194.31,89.15 0 top
U$255  SPARKX-LOGO4  [SPARKX-MEDIUM]  214.63,89.15 0 bottom
U$256  [PWR5]  10.67,102.23 90 top
U$257  [I_SUPER2_C-()-04]  19.56,100.58 90 top
U$258  [QWIIC_ALPHANUMERIC0]  24.64,118.11 0 top
U$259  [DISPLAY1]  30.99,116.2 0 top
U$260  [QWIIC_ALPHANUMERIC0]  34.04,118.11 0 bottom
U$261  [DISPLAY1]  27.81,116.2 0 bottom
U$262  MOUNTING_HOLE_M2-0.4X6  [MOUNTING_HOLE_M2-0.4X6]  42.42,106.17 0 top
U$263  MOUNTING_HOLE_M2-0.4X6  [MOUNTING_HOLE_M2-0.4X6]  17.02,106.17 0 top
U$264  [A00]  46.1,112.9 0 top
U$265  [A11]  43.94,107.82 0 top
U$266  [QWIIC_4MM]  17.02,113.16 0 top
U$267  [32]  38.99,103.89 0 top
U$268  [C0]  38.99,109.98 0 top
U$269  [D1]  38.99,108.59 0 top
U$270  [G3]  38.86,102.36 0 top
U$271  SPARKX-LOGO4  [SPARKX-MEDIUM]  19.56,117.6 0 top
U$272  SPARKX-LOGO4  [SPARKX-MEDIUM]  39.88,117.6 0 bottom
U$273  [PWR5]  54.36,102.23 90 top
U$274  [I_SUPER2_C-()-04]  63.25,100.58 90 top
U$275  [QWIIC_ALPHANUMERIC0]  68.33,118.11 0 top
U$276  [DISPLAY1]  74.68,116.2 0 top
U$277  [QWIIC_ALPHANUMERIC0]  77.72,118.11 0 bottom
U$278  [DISPLAY1]  71.5,116.2 0 bottom
U$279  MOUNTING_HOLE_M2-0.4X6  [MOUNTING_HOLE_M2-0.4X6]  86.11,106.17 0 top